# Altium PCB Balance_car.PcbDoc
Units mm, origin at the board's own origin, x right, y up, seen from the top; angles counter-clockwise.
Board outline 100 x 52 mm, 2 copper layers (Top Layer, Bottom Layer); 19 components, 25 nets, 110 pads, 6 vias.
Unrouted connection lines stored in the file: 62.
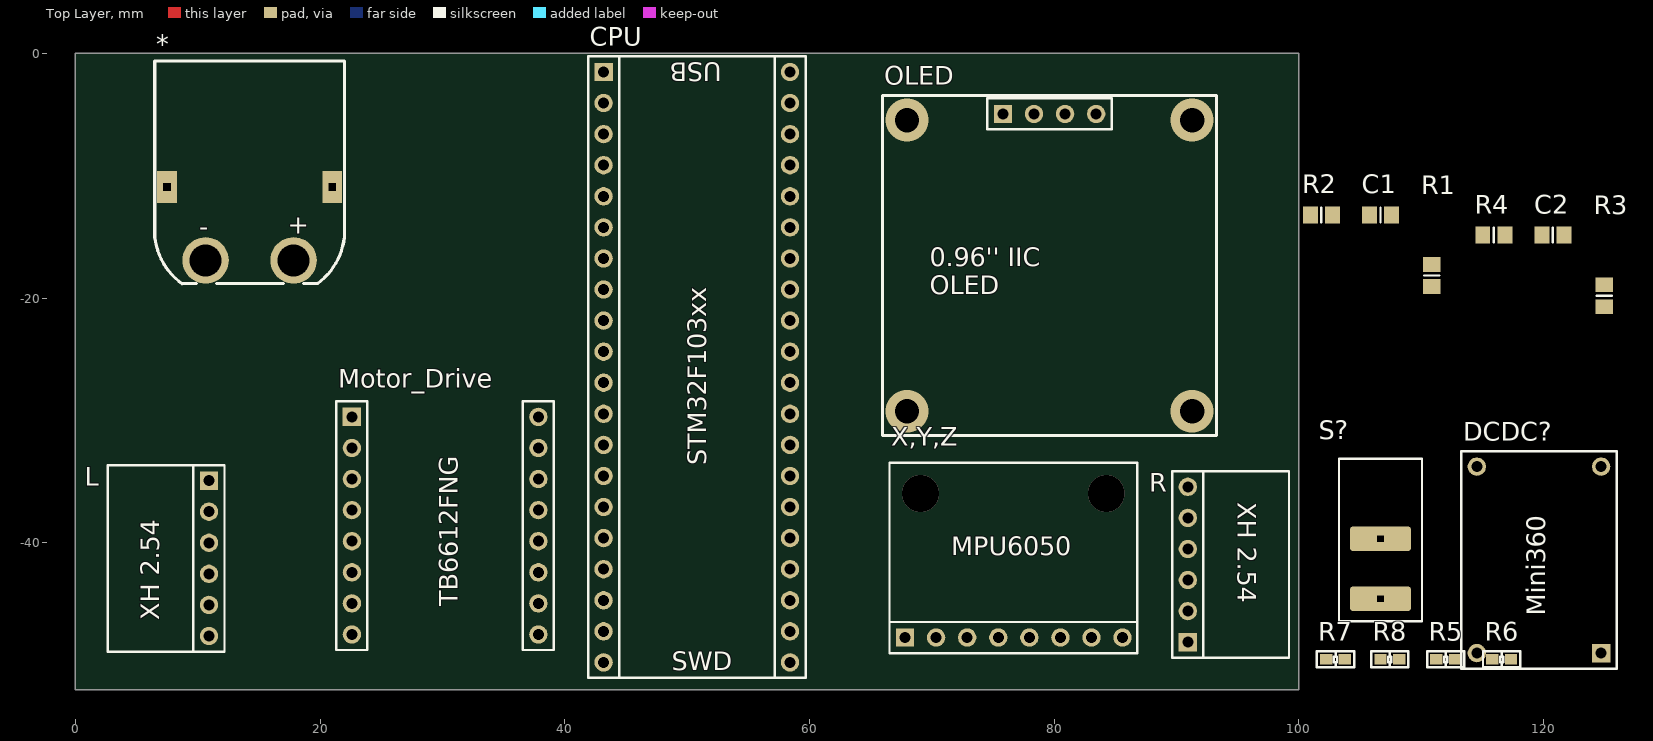
[diagram p0: Top Layer view]
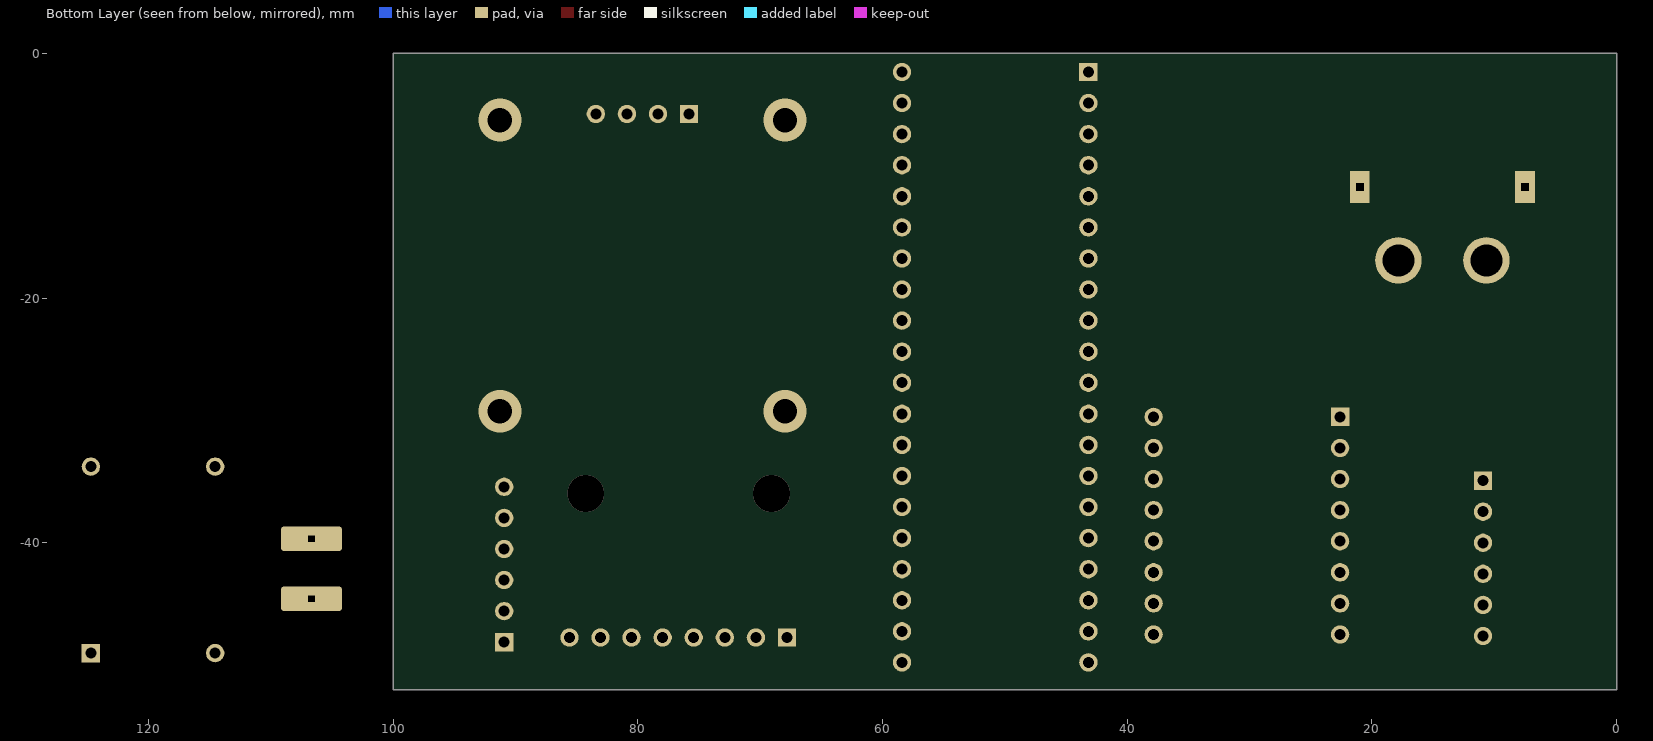
[diagram p1: Bottom Layer view, seen from below]

## Layer stack, top to bottom
Top Solder: solder mask 0.0102, Solder Resist, Dk 3.5
Top Layer: signal copper 0.0356
Dielectric 1: dielectric 0.32, FR-4, Dk 4.8
Bottom Layer: signal copper 0.0356
Bottom Solder: solder mask 0.0102, Solder Resist, Dk 3.5

## Board outline
0,-52 100,-52 100,0 0,0

## Design rules (kind name [scope] priority, off if disabled: settings)
Clearance [All] p1: gap=0.254 ignorepadtopadclearanceinfootprint=FALSE except(0: Arc-Hole Track-Hole SMDPad-Hole THPad-Hole Via-Hole Fill-Hole Poly-Hole Region-Hole Text-Hole)
PolygonConnect [All] p1: connectstyle=Relief reliefconductorwidth=0.254 reliefentries=4 polygonreliefangle="90 Angle" airgapwidth=0.254
RoomDefinition Power [InComponentClass('Power')] p1: confinementstyle=ConfineIn formatcopy=TRUE lockcomponents=FALSE outline -38.481,-111.252 12.319,-111.252 12.319,-85.852 -38.481,-85.852
RoomDefinition Balance_car [InComponentClass('Balance_car')] p2: confinementstyle=ConfineIn formatcopy=TRUE lockcomponents=FALSE outline -38.481,-111.252 12.319,-111.252 12.319,-85.852 -38.481,-85.852
RoutingVias [All] p1: holewidth=0.711 width=1.27 viastyle="Through Hole" minholewidth=0.711 minwidth=1.27 maxholewidth=0.711 maxwidth=1.27
SolderMaskExpansion [All] p1: expansion=0.102 istentingtop=FALSE
Width [All] p1: maxlimit=0.254 minlimit=0.254 preferedwidth=0.254
30 further rules are at their usual default settings.

## Classes and differential pairs
component class Power: * DCDC? S?
component class Balance_car: C1 C2 CPU L Motor_Drive OLED R R1 R2 R3 R4 R5 R6 R7 R8 X,Y,Z

## Components (designator, comment, footprint, x,y, rotation, side; value= is the part's Value field where it differs from the comment)
* "XT60PW-M" XT60PW-M 10.643,-16.922 r0 top
C1 "Cap" 6-0805_N 106.68,-13.208 r0 top value=100nF
C2 "Cap" 6-0805_N 120.777,-14.859 r0 top value=100nF
CPU "STM32F103_mini" STM32F103_mini 43.18,-1.524 r0 top
DCDC? "Mini360" Mini360 114.554,-49.022 r90 top
L "AB_Encoder" AB_Encoder 10.922,-34.925 r0 top
Motor_Drive "TB6612FNG" TB6612FNG 22.606,-29.718 r0 top
OLED "OLED_IIC" OLED 75.819,-4.953 r0 top
R "AB_Encoder" AB_Encoder 90.932,-48.133 r180 top
R1 "Res2" 6-0805_N 110.871,-18.161 r90 top value=10K
R2 "Res2" 6-0805_N 101.854,-13.208 r0 top value=1K
R3 "Res2" 6-0805_N 124.968,-19.812 r90 top value=10K
R4 "Res2" 6-0805_N 115.951,-14.859 r0 top value=1K
R5 "4.7K" R0603 112.014,-49.53 r0 top
R6 "4.7K" R0603 116.586,-49.53 r0 top
R7 "4.7K" R0603 102.997,-49.53 r0 top
R8 "4.7K" R0603 107.442,-49.53 r0 top
S? "SW-PB" SW-PB 106.68,-44.577 r90 top
X,Y,Z "MPU6050" MPU6050 66.548,-49.022 r0 top

## Footprints (in the part's own frame and the unit in brackets; to place one, negate y for a bottom-side part, rotate by r counter-clockwise, add the part's x,y. Pads: shape width x height; smd on the part's side, far side on the other; paste and mask are expansions set on the pad)
6-0805_N [mm] "Chip Resistor, Body 2.0x1.2mm, IPC Medium Density"
  rect 1.2x1.4 smd: 1(-0.9,0) 2(0.9,0)
  silkscreen extent 0,-0.6 0,0.6, body extent -1.07,-0.7 1.07,0.7, height 0.7
AB_Encoder [mm]
  rect 1.5x1.5 hole 0.9: 1(0,0)
  round 1.5 hole 0.9: 2(0,-2.54) 3(0,-5.08) 4(0,-7.62) 5(0,-10.16) 6(0,-12.7)
  silkscreen extent -8.27,-13.97 1.27,1.27
Mini360 [mm]
  rect 1.5x1.5 hole 0.9: 1(0,-10.16)
  round 1.5 hole 0.9: 2(0,0) 3(15.24,-10.16) 4(15.24,0)
  silkscreen extent -1.27,-11.43 16.51,1.27
MPU6050 [mm] "GY-521"
  rect 1.5x1.5 hole 0.9: 1(1.27,1.27)
  round 1.5 hole 0.9: 2(3.81,1.27) 3(6.35,1.27) 4(8.89,1.27) 5(11.43,1.27) 6(13.97,1.27) 7(16.51,1.27) 8(19.05,1.27)
  silkscreen extent 0,0 20.26,15.56
OLED [mm] "0.96 IIC"
  rect 1.5x1.5 hole 0.9: 1(0,0)
  round 1.5 hole 0.9: 2(2.54,0) 3(5.08,0) 4(7.62,0)
  silkscreen extent -9.84,-26.3 17.46,1.5
R0603 [mil]
  rect 40x35 smd: 1(-29.92,0) 2(29.92,0)
  silkscreen extent -60,-26 60,26
STM32F103_mini [mm]
  rect 1.5x1.5 hole 0.9: 1(0,0)
  round 1.5 hole 0.9: 2(0,-2.54) 3(0,-5.08) 4(0,-7.62) 5(0,-10.16) 6(0,-12.7) 7(0,-15.24) 8(0,-17.78) 9(0,-20.32) 10(0,-22.86) 11(0,-25.4) 12(0,-27.94) 13(0,-30.48) 14(0,-33.02) 15(0,-35.56) 16(0,-38.1) 17(0,-40.64) 18(0,-43.18) 19(0,-45.72) 20(0,-48.26) 21(15.24,-48.26) 22(15.24,-45.72) 23(15.24,-43.18) 24(15.24,-40.64) 25(15.24,-38.1) 26(15.24,-35.56) 27(15.24,-33.02) 28(15.24,-30.48) 29(15.24,-27.94) 30(15.24,-25.4) 31(15.24,-22.86) 32(15.24,-20.32) 33(15.24,-17.78) 34(15.24,-15.24) 35(15.24,-12.7) 36(15.24,-10.16) 37(15.24,-7.62) 38(15.24,-5.08) 39(15.24,-2.54) 40(15.24,0)
  silkscreen extent -1.27,-49.53 16.51,1.27
SW-PB [mm] "船型开关"
  rrect25% 2x5 hole 0.5 square: 1(0,0) 2(4.9,0)
  silkscreen extent -1.85,-3.39 11.45,3.39, body extent -2.75,-5.2 12.25,5.2, height 12.8
TB6612FNG [mm] "HW-166"
  rect 1.5x1.5 hole 0.9: 1(0,0)
  round 1.5 hole 0.9: 2(0,-2.54) 3(0,-5.08) 4(0,-7.62) 5(0,-10.16) 6(0,-12.7) 7(0,-15.24) 8(0,-17.78) 9(15.24,-17.78) 10(15.24,-15.24) 11(15.24,-12.7) 12(15.24,-10.16) 13(15.24,-7.62) 14(15.24,-5.08) 15(15.24,-2.54) 16(15.24,0)
  silkscreen extent -1.27,-19.05 16.51,1.27
XT60PW-M [mm]
  round 3.8 hole 2.6: 1(7.2,0) 2(0,0)
  rect 1.6x2.6 hole 0.6 square: 3(-3.15,6) 4(10.35,6)
  silkscreen extent -4.15,-1.92 11.35,16.3

## Part data
C1 C2: "Capacitor", LatestRevisionDate=17-Jul-2002, LatestRevisionNote="Re-released for DXP Platform.", PackageDescription="Radial Cap, Thru-Hole; 2 Leads; 0.3 in Pin Spacing", PackageReference=RAD-0.3, Published=8-Jun-2000, Publisher="Altium Limited"
CPU: "育松家的最小系统板"
DCDC?: "超小体积DC-DC同步整流降压模块"
L R: "带编码器 TT马达"
Motor_Drive: "HW-166"
OLED: "彩色屏或较新版"
R1 R2 R3 R4: "Resistor", LatestRevisionDate=17-Jul-2002, LatestRevisionNote="Re-released for DXP Platform.", PackageDescription="Axial Device, Thru-Hole; 2 Leads; 0.4 in Pin Spacing", PackageReference=AXIAL-0.4, Published=8-Jun-2000, Publisher="Altium Limited"
R5 R6 R7 R8: library part Res, "Resistor", LatestRevisionDate=17-Jul-2002, LatestRevisionNote="Re-released for DXP Platform.", PackageDescription="Axial Device, Thru-Hole; 2 Leads; 0.4 in Pin Spacing", PackageReference=AXIAL-0.4, Published=8-Jun-2000, Publisher="Altium Limited"
S?: "船型开关", LatestRevisionDate=17-Jul-2002, LatestRevisionNote="Re-released for DXP Platform.", PackageDescription="Switch; 2 Leads", PackageReference=SPST-2, Published=24-Mar-1999, Publisher="Altium Limited"
X,Y,Z: "GY-521"

## Via types
v1: diameter 3.5, hole 2, Top Layer to Bottom Layer, 4 vias
v2: diameter 3, hole 3, Top Layer to Bottom Layer, 2 vias

## Nets (pads, with @x,y where several pads share a name; then routed paths per layer and width w, separated by ;. In a path a pad name is that pad's centre, name@x,y a point inside that pad or via, vN(x,y) a via of type N, cw(c..) or ccw(c..) an arc to the next point about the centre after c; other vN are vias at no path point)
+5: CPU.18 DCDC?.3 L.2 Motor_Drive.2 OLED.2 R3.1 R5.2 R6.2 R7.2 R8.2 R.2 X,Y,Z.1
AIN1: CPU.12 Motor_Drive.14
AIN2: CPU.13 Motor_Drive.15
BAT_V: C1.2 CPU.25 R1.2 R2.1
BIN1: CPU.16 Motor_Drive.12
BIN2: CPU.17 Motor_Drive.11
ENCODER_LA: CPU.6 L.4
ENCODER_LB: CPU.7 L.3
ENCODER_RA: CPU.8 R.4
ENCODER_RB: CPU.9 R.3
GND: *.2 *.3 *.4 C1.1 C2.1 CPU.19 CPU.39 CPU.40 DCDC?.2 DCDC?.4 L.5 Motor_Drive.3 Motor_Drive.8 Motor_Drive.9 OLED.1 R2.2 R4.2 R.5 X,Y,Z.2
L+: L.6 Motor_Drive.4
L-: L.1 Motor_Drive.5
MPU6050_SCL: CPU.14 R8.1 X,Y,Z.3
MPU6050_SDA: CPU.15 R7.1 X,Y,Z.4
OLED_SCL: CPU.36 OLED.3 R6.1
OLED_SDA: CPU.35 OLED.4 R5.1
PWMA: CPU.1 Motor_Drive.16
PWMB: CPU.2 Motor_Drive.10
R+: Motor_Drive.7 R.6
R-: Motor_Drive.6 R.1
STBY: CPU.11 Motor_Drive.13
SYS_V: C2.2 CPU.26 R3.2 R4.1
V_BAT: *.1 S?.1
VCC: DCDC?.1 Motor_Drive.1 R1.1 S?.2
pads on no net: CPU.3 CPU.4 CPU.5 CPU.10 CPU.20 CPU.21 CPU.22 CPU.23 CPU.24 CPU.27 CPU.28 CPU.29 CPU.30 CPU.31 CPU.32 CPU.33 CPU.34 CPU.37 CPU.38 X,Y,Z.5 X,Y,Z.6 X,Y,Z.7 X,Y,Z.8
copper on no net:
  other v1: 67.979,-29.253 91.279,-29.253 67.979,-5.461 91.279,-5.453
  other v2: 69.073,-35.977 84.266,-35.977

## Silkscreen, mask and mechanical layers (free items; w line width, h text height)
Mechanical 1:
  the board outline again, w0.127

## Text inside footprints (layer, text, board x,y; h text height)
*: Top Overlay "+" at 17.374,-14.763 h1.52; Top Overlay "-" at 10.135,-14.89 h1.52
CPU: Top Overlay "USB" at 52.831,-0.762 h1.52 r180; Top Overlay "SWD" at 48.769,-50.419 h1.52; Top Overlay "STM32F103xx" at 51.562,-33.652 h1.52 r90
L: Top Overlay "XH 2.54" at 6.858,-46.355 h1.52 r90
OLED: Top Overlay "0.96'' IIC  / OLED" at 69.853,-19.697 h1.52
R: Top Overlay "XH 2.54" at 94.996,-36.703 h1.52 r270